# Altium PCB PCB_V№6.PcbDoc
Units mm, origin at the board's own origin, x right, y up, seen from the top; angles counter-clockwise.
Board outline 70 x 20 mm, 2 copper layers (Top Layer, Bottom Layer); 19 components, 24 nets, 106 pads, 83 vias.
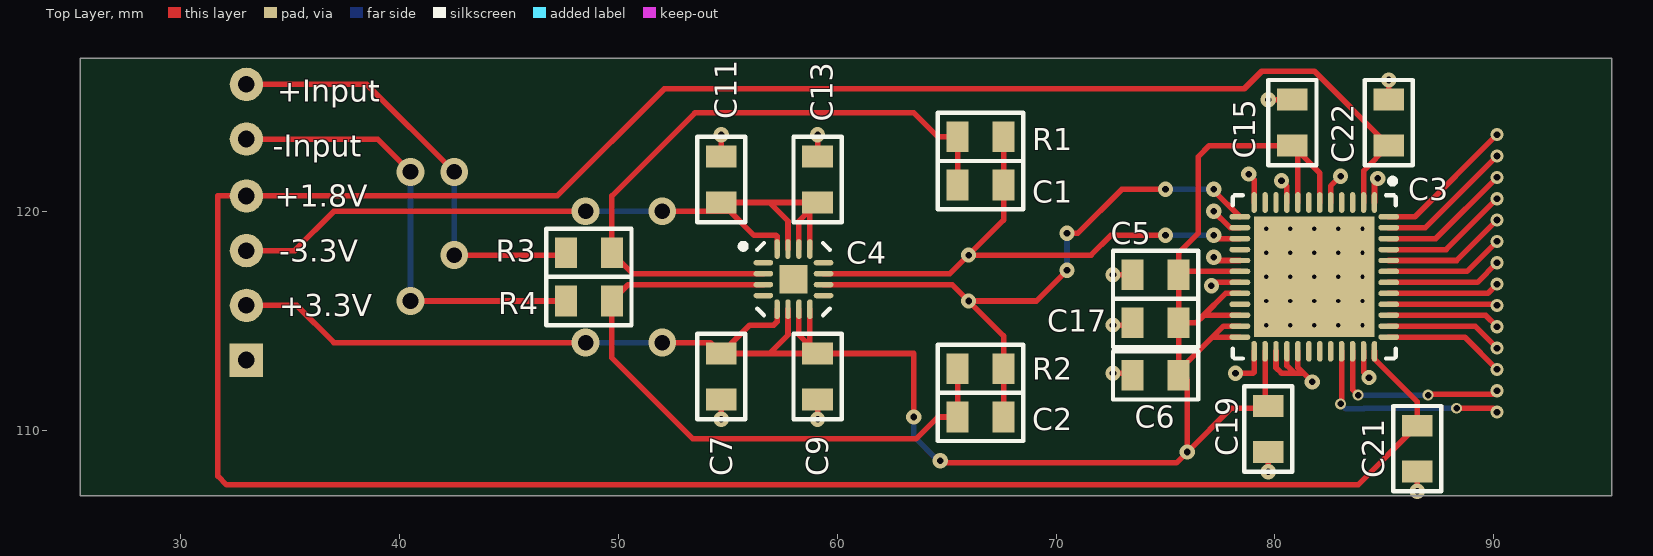
[diagram p0: Top Layer view]
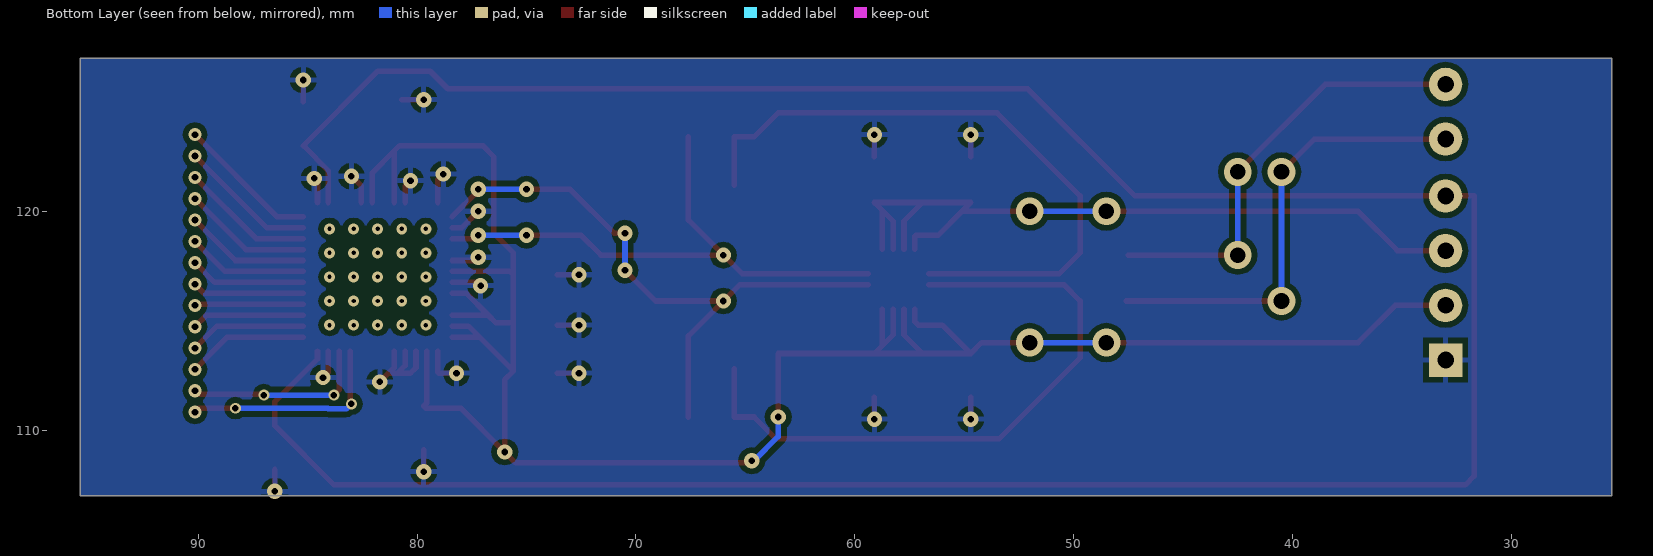
[diagram p1: Bottom Layer view, seen from below]

## Layer stack, top to bottom
Top Solder: solder mask 0.0102, Solder Resist, Dk 3.5
Top Layer: signal copper 0.0356
Dielectric 1: dielectric 0.32, FR-4, Dk 4.8
Bottom Layer: signal copper 0.0356
Bottom Solder: solder mask 0.0102, Solder Resist, Dk 3.5

## Board outline
25.4,107 95.4,107 95.4,127 25.4,127

## Design rules (kind name [scope] priority, off if disabled: settings)
Clearance [All] p1: gap=0.254
PolygonConnect [All] p1: connectstyle=Relief reliefconductorwidth=0.254 reliefentries=4 polygonreliefangle="90 Angle" airgapwidth=0.254
RoutingVias [All] p1: holewidth=0.711 width=1.27 viastyle="Through Hole" minholewidth=0.711 minwidth=1.27 maxholewidth=0.711 maxwidth=1.27
SolderMaskExpansion [All] p1: expansion=0.102
UnpouredPolygon [All] p1: allowunpoured=FALSE
Width [All] p1: maxlimit=0.254 minlimit=0.254 preferedwidth=0.254
29 further rules are at their usual default settings.

## Components (designator, comment, footprint, x,y, rotation, side; value= is the part's Value field where it differs from the comment)
C1 "0.1u" Capacitor 68.5,120.1 r180 top
C2 "0.1u" Capacitor 64.6,111.7 r0 top
C3 "ADS61B49" VQFN49 81.8,117 r270 top
C4 "ADA4932-1" CP-16-2 58,116.9 r0 top
C5 "0.1u" Capacitor 72.6,118.2 r0 top
C6 "0.1u" Capacitor 72.6,113.6 r0 top
C7 "0.1u" Capacitor 53.6,110.5 r90 top
C9 "0.1u" Capacitor 58,110.5 r90 top
C11 "0.1u" Capacitor 55.8,123.4 r270 top
C13 "0.1u" Capacitor 60.2,123.4 r270 top
C15 "0.1u" Capacitor 81.9,126 r270 top
C17 "0.1u" Capacitor 72.6,116 r0 top
C19 "0.1u" Capacitor 78.6,108.1 r90 top
C21 "0.1u" Capacitor 85.4,107.2 r90 top
C22 "0.1u" Capacitor 86.3,126 r270 top
R1 "PARAM" Resistor 64.6,124.5 r0 top
R2 "PARAM" Resistor 64.6,113.9 r0 top
R3 "PARAM" Resistor 46.7,119.2 r0 top
R4 "PARAM" Resistor 46.7,117 r0 top

## Footprints (in the part's own frame and the unit in brackets; to place one, negate y for a bottom-side part, rotate by r counter-clockwise, add the part's x,y. Pads: shape width x height; smd on the part's side, far side on the other; paste and mask are expansions set on the pad)
Capacitor [mm] "C?"
  rect 1x1.4 smd: 1(0.9,-1.1) 2(3,-1.1)
  silkscreen extent 0,-2.2 3.9,0
CP-16-2 [mm] "QFN, 16-Leads, Body 3,00x3,00mm, Pitch 0,50mm, Thermal Pad 1,30x1,30mm, IPC Medium Density"
  oval 0.9x0.25 smd: 1(-1.375,0.75) 2(-1.375,0.25) 3(-1.375,-0.25) 4(-1.375,-0.75) 9(1.375,-0.75) 10(1.375,-0.25) 11(1.375,0.25) 12(1.375,0.75)
  oval 0.25x0.9 smd: 5(-0.75,-1.375) 6(-0.25,-1.375) 7(0.25,-1.375) 8(0.75,-1.375) 13(0.75,1.375) 14(0.25,1.375) 15(-0.25,1.375) 16(-0.75,1.375)
  rect 1.3x1.3 smd: 17(0,0)
  silkscreen extent -2.42,-1.65 1.65,1.65, body extent -1.5,-1.5 1.5,1.5, height 1
Resistor [mm] "R?"
  rect 1x1.4 smd: 1(0.9,-1.1) 2(3,-1.1)
  silkscreen extent 0,-2.2 3.9,0
VQFN49 [mm] "QFN, 48-Leads, Body 7,00x7,00mm, Pitch 0,50mm, Thermal Pad 5,50x5,50mm, IPC Medium Density"
  oval 0.95x0.25 smd: 1(-3.4,2.75) 2(-3.4,2.25) 3(-3.4,1.75) 4(-3.4,1.25) 5(-3.4,0.75) 6(-3.4,0.25) 7(-3.4,-0.25) 8(-3.4,-0.75) 9(-3.4,-1.25) 10(-3.4,-1.75) 11(-3.4,-2.25) 12(-3.4,-2.75) 25(3.4,-2.75) 26(3.4,-2.25) 27(3.4,-1.75) 28(3.4,-1.25) 29(3.4,-0.75) 30(3.4,-0.25) 31(3.4,0.25) 32(3.4,0.75) 33(3.4,1.25) 34(3.4,1.75) 35(3.4,2.25) 36(3.4,2.75)
  oval 0.25x0.95 smd: 13(-2.75,-3.4) 14(-2.25,-3.4) 15(-1.75,-3.4) 16(-1.25,-3.4) 17(-0.75,-3.4) 18(-0.25,-3.4) 19(0.25,-3.4) 20(0.75,-3.4) 21(1.25,-3.4) 22(1.75,-3.4) 23(2.25,-3.4) 24(2.75,-3.4) 37(2.75,3.4) 38(2.25,3.4) 39(1.75,3.4) 40(1.25,3.4) 41(0.75,3.4) 42(0.25,3.4) 43(-0.25,3.4) 44(-0.75,3.4) 45(-1.25,3.4) 46(-1.75,3.4) 47(-2.25,3.4) 48(-2.75,3.4)
  rect 5.5x5.5 smd: 49(0,0)
  silkscreen extent -4.5,-3.72 3.72,3.73, body extent -3.58,-3.57 3.57,3.58, height 1

## Part data
C1 C2 C5 C6 C7 C9 C11 C13 C15 C17 C19 C21 C22: library part Capacitor
R1 R2 R3 R4: library part Resistor

## Free pads (board coordinates)
  round 1.524 hole 0.762: 0(33,123.3) 0(33,125.8) 0(33,120.7) 1(33,118.2) 2(33,115.7)
  rect 1.524x1.524 hole 0.762: 3(33,113.2)

## Via types
v1: diameter 0.7, hole 0.3, Top Layer to Bottom Layer, 32 vias
v2: diameter 0.5, hole 0.2, Top Layer to Bottom Layer, 25 vias
v3: diameter 0.6, hole 0.3, Top Layer to Bottom Layer, 14 vias
v4: diameter 1.27, hole 0.711, Top Layer to Bottom Layer, 8 vias
v5: diameter 0.5, hole 0.3, Top Layer to Bottom Layer, 4 vias

## Nets (pads, with @x,y where several pads share a name; then routed paths per layer and width w, separated by ;. In a path a pad name is that pad's centre, name@x,y a point inside that pad or via, vN(x,y) a via of type N, cw(c..) or ccw(c..) an arc to the next point about the centre after c; other vN are vias at no path point)
+1.8V: C3.2 C3.36 C21.2 C22.2 pad.0@33,120.7 | length 133.4
  Top Layer w0.254: C3.2 84.05,121.85 C22.2 81.8,126.4 79.4,126.4 78.6,125.6 52.1,125.6 47.2,120.7 33,120.7 31.7,120.7 31.7,107.9 32.1,107.5 83.8,107.5 C21.2 86.5,111.3 84.55,113.25 C3.36
+3.3V: C3.6 C3.8 C3.18 C3.20 C3.22 C3.23 C3.24 C3.26 C4.5 C4.6 C4.7 C4.8 C5.2 C6.2 C7.2 C9.2 C15.2 C17.2 C19.2 pad.2 | length 102.4
  Top Layer w0.254: pad.2 35.3,115.7 37,114 v4(48.5,114) ; v4(52,114) 54.2,114 C7.2 ; C4.5 57.25,114.95 57.1,114.8 56,114.8 C7.2 ; C4.6 57.75,114.35 56.9,113.5 ; C4.7 58.25,114.35 C9.2@58.75,113.85 ; C4.8 C9.2@58.75,113.85 ; v1(63.5,110.6) 63.5,113.5 C9.2 ; v1(64.7,108.6) 64.8,108.5 75.5,108.5 v1(76,109) ; 77.25,114.25 C3.24 ; C3.23 77.65,114.75 C6.2@75.6,112.7 ; C3.22 76.75,115.25 ; C3.20 77.75,116.25 76.75,115.25 ; C3.18 75.75,117.25 C5.2 ; C3.26 79.55,111.25 C19.2 79.6,111 78,111 v1(76,109) ; C3.8 C15.2@81.05,122.75 ; C3.6 82.05,121.75 C15.2@81.05,122.75 ; C7.2 56.9,113.5 ; 56.9,113.5 C9.2 ; C9.2@58.75,113.85 C9.2 ; C6.2@75.6,112.7 76,112.3 v1(76,109) ; C6.2@75.6,112.7 C17.2 ; C17.2 76.4,114.9 76.75,115.25 ; C17.2 C5.2 ; C5.2 75.6,118.1 76.5,119 76.5,122.5 77,123 C15.2 C15.2@81.05,122.75
  Bottom Layer w0.254: v4(48.5,114) v4(52,114) ; v1(63.5,110.6) 63.5,109.7 64.6,108.6 v1(64.7,108.6)
+INPUT_SIGNAL: pad.0@33,125.8 R3.1 | length 20
  Top Layer w0.254: pad.0@33,125.8 38.5,125.8 v4(42.5,121.8) ; v4(42.5,118) R3.1@47.5,118
  Bottom Layer w0.254: v4(42.5,118) v4(42.5,121.8)
-3.3V: C4.13 C4.14 C4.15 C4.16 C11.2 C13.2 pad.1 | length 37.7
  Top Layer w0.254: pad.1 35.2,118.2 37,120 v4(48.5,120) ; v4(52,120) C11.2@55.1,120 ; C4.16 57.25,118.85 57.2,118.9 56.2,118.9 C11.2@55.1,120 ; C4.15 57.75,119.55 56.9,120.4 ; C4.14 58.25,119.55 C13.2@58.75,120.05 ; C4.13 C13.2@58.75,120.05 ; C11.2@55.1,120 C11.2 56.9,120.4 ; 56.9,120.4 C13.2 C13.2@58.75,120.05
  Bottom Layer w0.254: v4(48.5,120) v4(52,120)
-INPUT_SIGNAL: pad.0@33,123.3 R4.1 | length 21.1
  Top Layer w0.254: pad.0@33,123.3 39,123.3 v4(40.5,121.8) ; v4(40.5,115.9) R4.1
  Bottom Layer w0.254: v4(40.5,115.9) 40.5,117 v4(40.5,121.8)
D0M: C3.33 | length 9.7
  Top Layer w0.254: v5@83.05,111.25 C3.33 ; v5(88.3,111) 89.975,111 v3(90.15,110.825)
  Bottom Layer w0.254: v5(83,111.2) 83.231,110.969 84.061,110.969 84.092,111 v5(88.3,111)
D0P: C3.34 | length 8.5
  Top Layer w0.254: C3.34 83.55,111.85 v5(83.8,111.6) ; v5(87,111.6) 87.031,111.631 89.981,111.631 v3(90.15,111.8)
  Bottom Layer w0.254: v5(83.8,111.6) v5(87,111.6)
D2M: C3.37 | length 5.6
  Top Layer w0.254: C3.37 88.675,114.25 v3(90.15,112.775)
D2P: C3.38 | length 5.4
  Top Layer w0.254: C3.38 89.15,114.75 v3(90.15,113.75)
D4M: C3.39 | length 5.2
  Top Layer w0.254: C3.39 89.625,115.25 v3(90.15,114.725)
D4P: C3.40 | length 5
  Top Layer w0.254: C3.40 90.1,115.75 v3(90.15,115.7)
D6M: C3.41 | length 5.1
  Top Layer w0.254: C3.41 89.725,116.25 v3(90.15,116.675)
D6P: C3.42 | length 5.3
  Top Layer w0.254: C3.42 89.25,116.75 v3(90.15,117.65)
D8M: C3.43 | length 5.5
  Top Layer w0.254: C3.43 88.775,117.25 v3(90.15,118.625)
D8P: C3.44 | length 5.7
  Top Layer w0.254: C3.44 88.3,117.75 v3(90.15,119.6)
D10M: C3.45 | length 5.9
  Top Layer w0.254: C3.45 87.825,118.25 v3(90.15,120.575)
D10P: C3.46 | length 6.1
  Top Layer w0.254: C3.46 87.35,118.75 v3(90.15,121.55)
D12M: C3.47 | length 6.3
  Top Layer w0.254: C3.47 86.875,119.25 v3(90.15,122.525)
D12P: C3.48 | length 6.5
  Top Layer w0.254: C3.48 86.4,119.75 v3(90.15,123.5)
GND: C3.1 C3.5 C3.9 C3.12 C3.14 C3.17 C3.19 C3.25 C3.27 C3.28 C3.29 C3.35 C5.1 C6.1 C7.1 C9.1 C11.1 C13.1 C15.1 C17.1 C19.1 C21.1 C22.1 pad.3 | length 28.2
  Top Layer w0.254: v1(54.7,110.5) C7.1@54.7,111.5 ; C11.1 v1(54.7,123.5) ; v1(59.1,110.5) C9.1@59.1,111.5 ; C13.1 v1(59.1,123.5) ; v1(72.6,112.6) C6.1@73.6,112.6 ; v1(72.6,114.8) C17.1@73.6,114.8 ; v1(72.6,117.1) C5.1@73.6,117.1 ; v1(77.1,116.6) 77.25,116.75 C3.19 ; v1(77.2,117.9) 77.35,117.75 C3.17 ; v1(77.2,120) 77.95,119.25 C3.14 ; v1(78.2,112.6) 79,112.6 79.05,112.65 C3.25 ; v1(78.8,121.7) 79.05,121.45 C3.12 ; v1(79.7,108.1) C19.1@79.7,109.1 ; v1(79.7,125.1) C15.1@80.7,125.1 ; C3.27 80.05,112.85 80.3,112.6 80.9,112.6 ; v1(80.3,121.4) 80.55,121.15 C3.9 ; C3.28 80.55,112.95 80.9,112.6 ; C3.29 81.05,112.85 81.3,112.6 ; v1(81.7,112.2) 81.3,112.6 ; C3.5 82.55,121.15 v1(83,121.6) ; C3.35 84.05,112.65 v1(84.3,112.4) ; C3.1 84.55,121.35 v1(84.7,121.5) ; C22.1@85.2,125 v1(85.2,126) ; v1(86.5,107.2) C21.1@86.5,108.2 ; 80.9,112.6 81.3,112.6
NetC1_1: C1.1 C3.15 C4.11 R1.2 | length 25.9
  Top Layer w0.254: C4.11 65.15,117.15 v1(66,118) ; R1.2 C1.1 67.6,119.6 v1(66,118) ; v1(75,118.9) 72.5,118.9 71.6,118 v1(66,118) ; v1(77.2,118.9) 77.35,118.75 C3.15
  Bottom Layer w0.254: v1(75,118.9) v1(77.2,118.9)
NetC1_2: C1.2 C4.2 R1.1 R3.2 | length 29.9
  Top Layer w0.254: C4.2 50.65,117.15 R3.2 49.7,120.7 53.5,124.5 63.5,124.5 64.6,123.4 R1.1 C1.2
NetC2_1: C2.1 C4.3 R2.1 R4.2 | length 29.8
  Top Layer w0.254: C4.3 50.45,116.65 R4.2 49.7,113.3 53.4,109.6 63.6,109.6 64.6,110.6 C2.1 R2.1
NetC2_2: C2.2 C3.13 C4.10 R2.2 | length 29
  Top Layer w0.254: C4.10 65.25,116.65 v1(66,115.9) ; C2.2 R2.2 67.6,114.3 v1(66,115.9) ; v1(70.5,117.3) 69.1,115.9 v1(66,115.9) ; v1(70.5,119) 71,119 73,121 v1(75,121) ; v1(77.2,121) 77.2,120.95 C3.13
  Bottom Layer w0.254: v1(70.5,117.3) v1(70.5,119) ; v1(75,121) v1(77.2,121)
pads on no net: C3.3 C3.4 C3.7 C3.10 C3.11 C3.16 C3.21 C3.30 C3.31 C3.32 C3.49 C4.1 C4.4 C4.9 C4.12 C4.17
copper on no net:
  other v2: 79.6,114.8 80.7,114.8 81.8,114.8 82.9,114.8 84,114.8 79.6,115.9 80.7,115.9 81.8,115.9 82.9,115.9 84,115.9 79.6,117 80.7,117 81.8,117 82.9,117 84,117 79.6,118.1 80.7,118.1 81.8,118.1 82.9,118.1 84,118.1 79.6,119.2 80.7,119.2 81.8,119.2 82.9,119.2 84,119.2

## Polygon pours and split planes (outlines as drawn)
GND on Bottom Layer "GND" (solid, pour order 2): 25.4,127 95.4,127 95.4,107 25.4,107

## Silkscreen, mask and mechanical layers (free items; w line width, h text height)
Top Overlay:
  text "+Input" at 34.4,125 h1
  text "-Input" at 34.2,122.5 h1
  text "+1.8V" at 34.3,120.2 h1
  text "-3.3V" at 34.5,117.7 h1
  text "+3.3V" at 34.5,115.2 h1